# Altium PCB SIM908.PcbDoc
Units mm, origin at the board's own origin, x right, y up, seen from the top; angles counter-clockwise.
Board outline 152.4 x 101.6 mm, 2 copper layers (Top Layer, Bottom Layer), stack 0.325 mm thick; 92 components, 54 nets, 438 pads, 54 vias.
Unrouted connection lines stored in the file: 56.
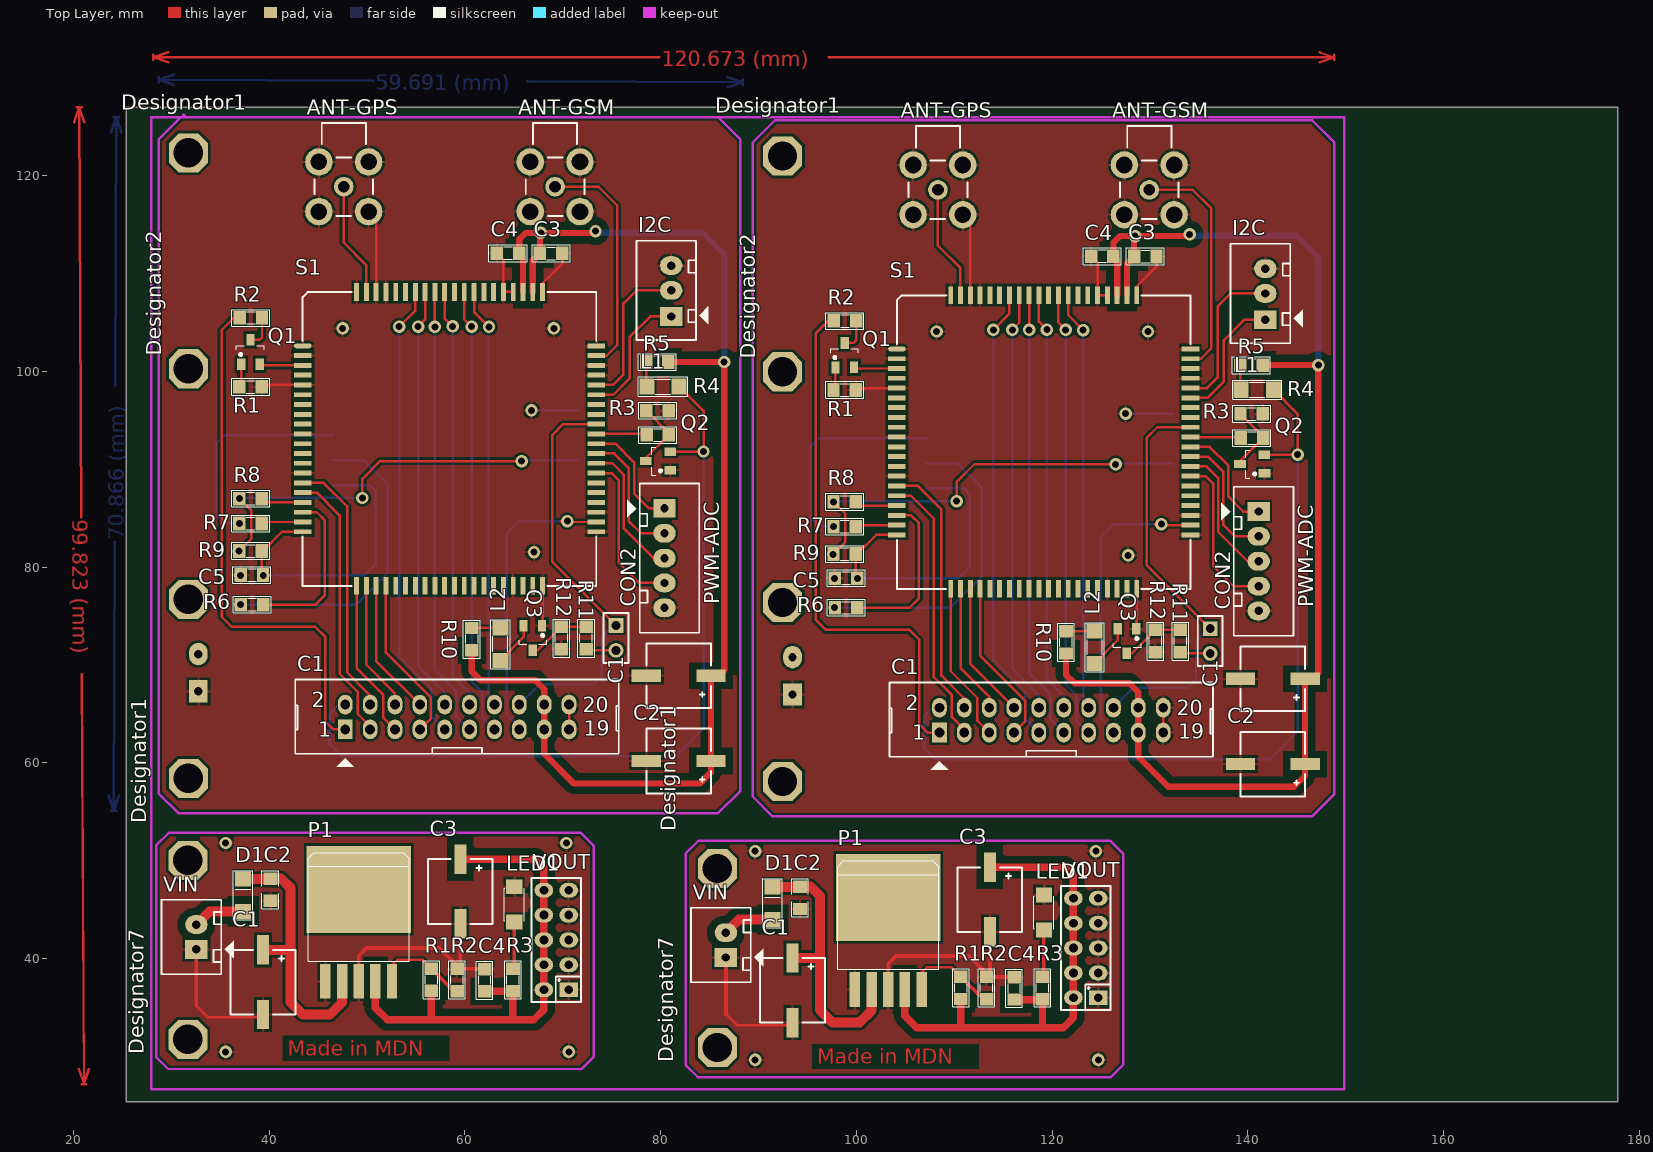
[diagram p0: Top Layer view]
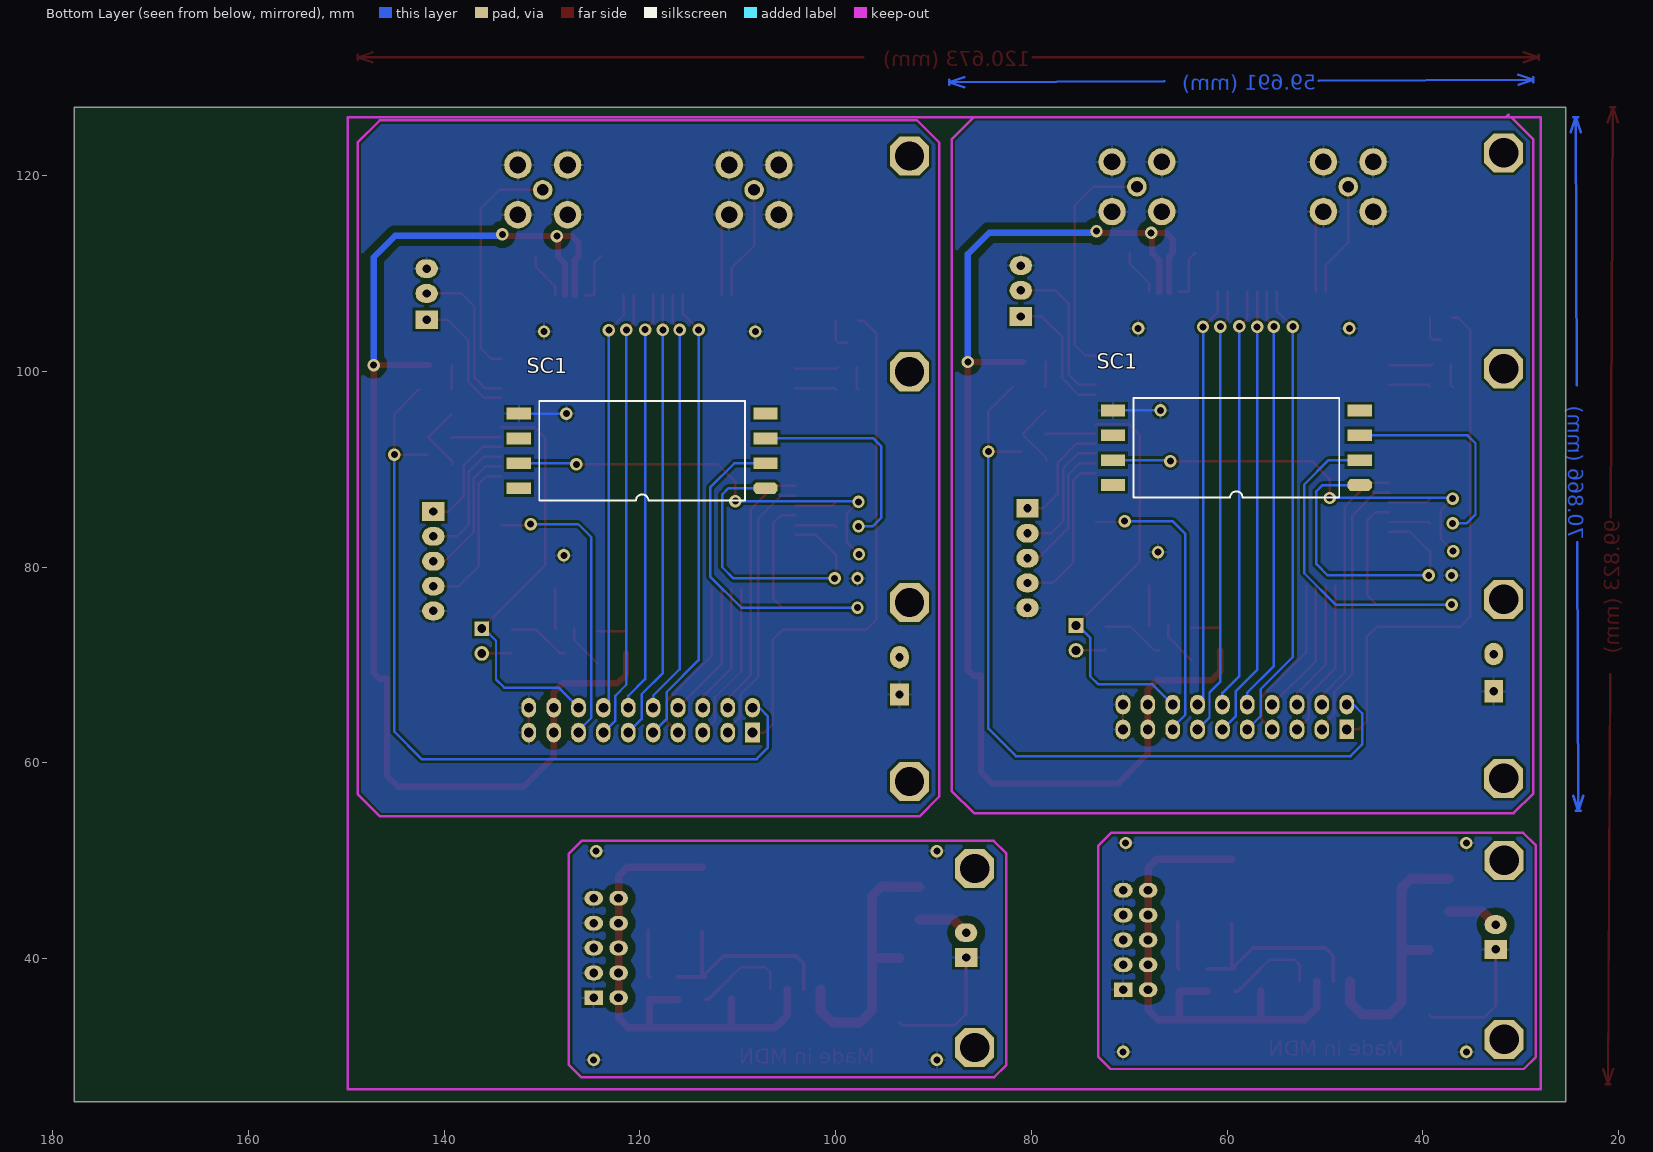
[diagram p1: Bottom Layer view, seen from below]
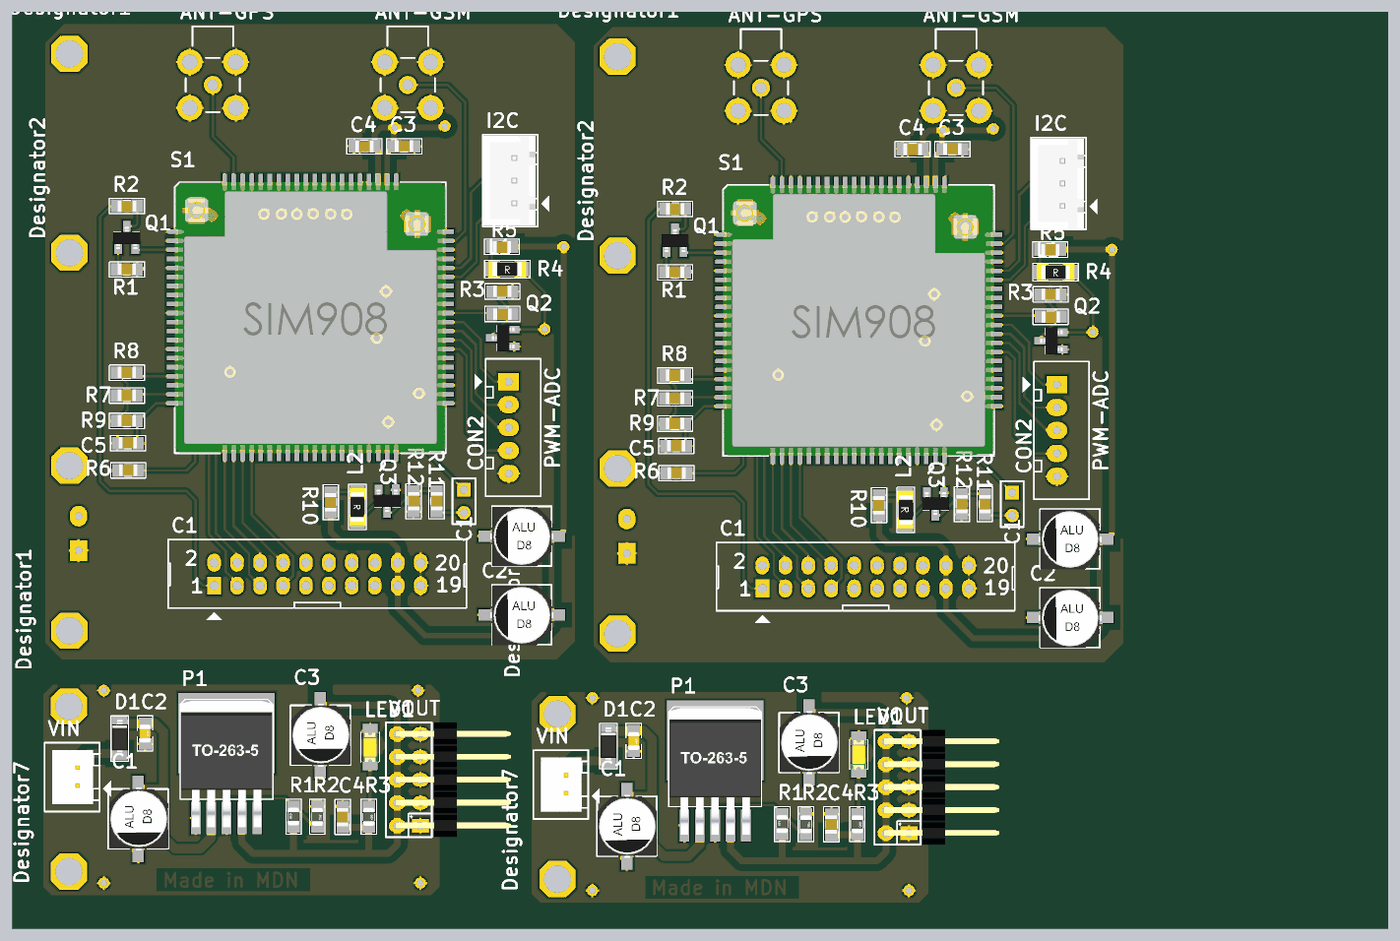
[diagram p2: 3D render of the assembled board from above, using the file's embedded part models]

## Layer stack, top to bottom
Top Layer: signal copper 0.0356
Dielectric 1: core 0.254, FR-4, Dk 4.2
Bottom Layer: signal copper 0.0356

## Board outline
25.4,25.4 177.8,25.4 177.8,127 25.4,127

## Design rules (kind name [scope] priority, off if disabled: settings)
Clearance Clearance_1 [InNet('IN')] p1: gap=0.762
Clearance OUT_1 [InNet('OUT')] p2: gap=0.762
Clearance VCC1 [InNet('VCC')] p3: gap=0.762
Clearance [All] p4: gap=0.254
PolygonConnect [All] p1: connectstyle=Relief reliefconductorwidth=0.254 reliefentries=4 polygonreliefangle="90 Angle" airgapwidth=0.254
RoutingVias [All] p1: holewidth=0.711 width=1.27 viastyle="Through Hole" minholewidth=0.711 minwidth=1.27 maxholewidth=0.711 maxwidth=1.27
SolderMaskExpansion [All] p1: expansion=0.102
UnpouredPolygon [All] p1: allowunpoured=FALSE
Width OUT [InNet('OUT')] p1: maxlimit=1.016 minlimit=0.762 preferedwidth=0.762
Width VCC [InNet('VCC')] p2: maxlimit=0.762 minlimit=0.635 preferedwidth=0.762
Width [All] p3: maxlimit=0.254 minlimit=0.254 preferedwidth=0.254
29 further rules are at their usual default settings.

## Components (designator, comment, footprint, x,y, rotation, side; value= is the part's Value field where it differs from the comment)
ANT-GPS "JP5" MCX5.08-H5 108.331,118.554 r270 top
ANT-GPS "JP5" MCX5.08-H5 47.625,118.872 r270 top
ANT-GSM "JP5" MCX5.08-H5 129.921,118.554 r270 top
ANT-GSM "JP5" MCX5.08-H5 69.215,118.872 r270 top
C1 "100uF/450V" CAP-D8-220uF/16V 93.472,36.767 r270 top
C1 "100uF" CAP-D8-220uF/16V 142.545,68.593 r180 top
C1 "Header 10x2" Hed2X10 108.483,63.106 r0 top (schematic designator Connector1)
C1 "Header 10x2" Hed2X10 47.777,63.424 r0 top (schematic designator Connector1)
C1 "100uF" CAP-D8-220uF/16V 81.839,68.91 r180 top
C1 "100uF/450V" CAP-D8-220uF/16V 39.37,37.592 r270 top
C2 "1uF/450V" CAP0805 94.234,46.215 r270 top
C2 "100uF" CAP-D8-220uF/16V 142.545,59.88 r180 top
C2 "100uF" CAP-D8-220uF/16V 81.839,60.198 r180 top
C2 "1uF/450V" CAP0805 40.132,47.041 r270 top
C3 "220uF/450V" CAP-D8-220uF/16V 113.64,46.038 r270 top
C3 "0.1uF" SM-0805 129.515,111.747 r180 top
C3 "0.1uF" SM-0805 68.809,112.065 r180 top
C3 "220uF/450V" CAP-D8-220uF/16V 59.538,46.863 r270 top
C4 "103" SM-0805 116.129,36.97 r270 top
C4 "o.1uF" SM-0805 125.12,111.773 r0 top
C4 "o.1uF" SM-0805 64.414,112.09 r0 top
C4 "103" SM-0805 62.027,37.795 r270 top
C5 "103" SM-0805 98.933,78.88 r180 top
C5 "103" SM-0805 38.227,79.197 r180 top
CON2 "JP2" HDR1X2 136.144,73.724 r270 top
CON2 "JP2" HDR1X2 75.438,74.041 r270 top
D1 "1N5822" Diode1206 91.44,45.657 r90 top
D1 "1N5822" Diode1206 37.338,46.482 r90 top
Designator1 "Comment" VIT 85.795,49.212 r0 top
Designator1 "Comment" VIT 92.456,122.009 r0 top
Designator1 "Comment" VIT 31.75,122.326 r0 top
Designator1 "Comment" VIT 31.693,50.038 r0 top
Designator2 "Comment" VIT 92.456,99.962 r0 top
Designator2 "Comment" VIT 31.75,100.279 r0 top
Designator7 "Comment" VIT 85.795,30.924 r0 top
Designator7 "Comment" VIT 31.693,31.75 r0 top
I2C "JP3" CON3 141.783,105.423 r90 top
I2C "JP3" CON3 81.077,105.74 r90 top
L1 "LED" SM-1206 140.945,98.133 r0 top
L1 "LED" SM-1206 80.239,98.45 r0 top
L2 "LED" SM-1206 124.333,71.819 r270 top
L2 "LED" SM-1206 63.627,72.136 r270 top
LED1 "LED" LED1206-Yellow 119.151,42.913 r90 top
LED1 "LED" LED1206-Yellow 65.049,43.739 r90 top
P1 "MIC29302" LM2576_TO-263 103.251,44.463 r0 top
P1 "MIC29302" LM2576_TO-263 49.149,45.288 r0 top
PWM-ADC "JP5" CON5 141.097,85.687 r270 top
PWM-ADC "JP5" CON5 80.391,86.004 r270 top
Q1 "C1815" 2N2222 98.806,101.663 r0 top
Q1 "C1815" 2N2222 38.1,101.981 r0 top
Q2 "C1815" 2N2222 140.437,90.538 r90 top
Q2 "C1815" 2N2222 79.731,90.856 r90 top
Q3 "C1815" 2N2222 127.635,72.453 r180 top
Q3 "C1815" 2N2222 66.929,72.771 r180 top
R1 "100k" RES0805 110.668,35.877 r90 top
R1 "10K" SM-0805 98.806,98.108 r180 top
R1 "10K" SM-0805 38.1,98.425 r180 top
R1 "100k" RES0805 56.566,36.703 r90 top
R2 "43k" RES0805 113.309,38.138 r270 top
R2 "4K7" SM-0805 98.831,105.169 r0 top
R2 "4K7" SM-0805 38.125,105.486 r0 top
R2 "43k" RES0805 59.207,38.964 r270 top
R3 "470" RES0805 119.012,38.138 r270 top
R3 "4.7K" SM-0805 140.411,93.205 r0 top
R3 "4.7K" SM-0805 79.705,93.523 r0 top
R3 "470" RES0805 64.91,38.964 r270 top
R4 "10K" SM-0805 140.386,95.669 r180 top
R4 "10K" SM-0805 79.68,95.987 r180 top
R5 "330" SM-0805 140.36,100.647 r0 top
R5 "330" SM-0805 79.654,100.965 r0 top
R6 "1k" SM-0805 98.958,75.857 r180 top
R6 "1k" SM-0805 38.252,76.175 r180 top
R7 "1k" SM-0805 98.806,84.138 r180 top
R7 "1k" SM-0805 38.1,84.455 r180 top
R8 "1k" SM-0805 98.806,86.677 r180 top
R8 "1k" SM-0805 38.1,86.995 r180 top
R9 "1k" SM-0805 98.806,81.343 r180 top
R9 "1k" SM-0805 38.1,81.661 r180 top
R10 "330" SM-0805 121.412,72.326 r270 top
R10 "330" SM-0805 60.706,72.644 r270 top
R11 "4.7K" SM-0805 133.096,72.453 r90 top
R11 "4.7K" SM-0805 72.39,72.771 r90 top
R12 "10K" SM-0805 130.556,72.453 r90 top
R12 "10K" SM-0805 69.85,72.771 r90 top
S1 "SIM908" SIM908 104.14,102.298 r0 top
S1 "SIM908" SIM908 43.434,102.616 r0 top
SC1 "SIM CARD" "SIM CARD" 107.163,88.075 r0 bottom
SC1 "SIM CARD" "SIM CARD" 46.457,88.392 r0 bottom
VIN "JP2" CON2 86.665,40.119 r90 top
VIN "JP2" CON2 32.563,40.945 r90 top
VOUT "Header 5x2" HED2X5_cen 124.714,36.005 r90 top
VOUT "Header 5x2" HED2X5_cen 70.612,36.83 r90 top

## Footprints (in the part's own frame and the unit in brackets; to place one, negate y for a bottom-side part, rotate by r counter-clockwise, add the part's x,y. Pads: shape width x height; smd on the part's side, far side on the other; paste and mask are expansions set on the pad)
2N2222 [mm] "SOT 23B"
  rect 0.85x1.2 smd: 1(-0.95,-1.25) 2(0.94,-1.245) 3(0,1.25)
  silkscreen extent -1.45,-0.38 1.4,0.64, body extent -1.5,-1.3 1.5,1.2, height 1.06
CAP0805 [mil]
  rect 50x55 smd: 1(-45,0) 2(45,0)
  silkscreen extent -77,-34 76,33, body extent -39,-25 39,25, height 31
CAP-D8-220uF/16V [mm] "6.3 x 7.7 mm"
  rect 3x1.25 smd: 1(-3.302,0) 2(3.302,0)
  silkscreen extent -3.3,-3.3 3.3,3.3, body extent -3.5,-3.25 3.5,3.35, height 7.72
CON2 [mil] "CON2"
  rect 75x90 hole 34: 1(0,0)
  oval 75x90 hole 34: 2(100,0)
  silkscreen extent -100,-150 200,140, body extent -68,-70 168,107, height 236
CON3 [mil] "CON 3"
  rect 75x90 hole 34: 1(-5,0)
  oval 75x90 hole 34: 2(100,0) 3(200,0)
  silkscreen extent -100,-150 300,140, body extent -95,-90 295,136, height 276
CON5 [mil] "CON5"
  rect 75x90 hole 34: 1(0,0)
  oval 75x90 hole 34: 2(100,0) 3(200,0) 4(300,0) 5(400,0)
  silkscreen extent -100,-150 500,140
Diode1206 [mil]
  rect 60x65 smd: 1(-65,0) 2(65,0)
  silkscreen extent -99,-38 99,39, body extent -72,-35 82,35, height 46
HDR1X2 [mm] "Connector; Header; 2 Position"
  rect 1.5x1.5 hole 0.9: 1(0,0)
  round 1.5 hole 0.9: 2(2.54,0)
  silkscreen extent -1.27,-1.27 3.81,1.27
HED2X5_cen [mm] "Connector; Header; 5x2 Position"
  rect 1.5x1.9 hole 0.9: 1(0,0)
  oval 1.5x1.9 hole 0.9: 2(2.54,0) 3(5.08,0) 4(7.62,0) 5(10.16,0) 6(0,2.54) 7(2.54,2.54) 8(5.08,2.54) 9(7.62,2.54) 10(10.16,2.54)
  silkscreen extent -1.27,-1.27 11.43,3.81, body extent -1.24,-10.02 11.46,2.86, height 5.02
Hed2X10 [mm] "Header 10x2,20 pin, connecter"
  rect 1.5x2 hole 1: 1(0,0)
  oval 1.5x2 hole 1: 2(0,2.54) 3(2.54,0) 4(2.54,2.54) 5(5.08,0) 6(5.08,2.54) 7(7.62,0) 8(7.62,2.54) 9(10.16,0) 10(10.16,2.54) 11(12.7,0) 12(12.7,2.54) 13(15.24,0) 14(15.24,2.54) 15(17.78,0) 16(17.78,2.54) 17(20.32,0) 18(20.32,2.54) 19(22.86,0) 20(22.86,2.54)
  silkscreen extent -5.1,-3.81 27.94,5.1
LED1206-Yellow [mil]
  rect 60x65 smd: 1(0,0) 2(142,0)
  silkscreen extent 6,-40 136,40, body extent 7,-31 133,32, height 43
LM2576_TO-263 [mil]
  rect 420x350 smd: 0(0,70.87)
  rect 42x140 smd: 1(-134,-299.13) 2(-67,-299.21) 3(0,-299.13) 4(67,-299.13) 5(134,-299.13)
  silkscreen extent -203,-218 203,218, body extent -200,-339 200,213, height 180
MCX5.08-H5 [mm] "Connector; RF Coaxial, MCX, Thru-Hole; 5 Position; Right-Angle"
  round 2 hole 1.2: 1(0,0)
  round 2.8 hole 1.7: 2(-2.54,-2.54) 3(2.54,-2.54) 4(2.54,2.54) 5(-2.54,2.54)
  silkscreen extent -6.5,-3 3,3
RES0805 [mil]
  rect 50x55 smd: 1(0,0) 2(90,0)
  silkscreen extent -32,-34 121,33, body extent 6,-25 84,25, height 31
SIM908 [mm]
  oval 1.8x0.5 smd: 1(0,0)
  rect 1.8x0.5 smd: 2(0,-1) 3(0,-2) 4(0,-3) 5(0,-4) 6(0,-5) 7(0,-6) 8(0,-7) 9(0,-8) 10(0,-9) 11(0,-10) 12(0,-11) 13(0,-12) 14(0,-13) 15(0,-14) 16(0,-15) 17(0,-16) 18(0,-17) 19(0,-18) 20(0,-19) 41(30,-19) 42(30,-18) 43(30,-17) 44(30,-16) 45(30,-15) 46(30,-14) 47(30,-13) 48(30,-12) 49(30,-11) 50(30,-10) 51(30,-9) 52(30,-8) 53(30,-7) 54(30,-6) 55(30,-5) 56(30,-4) 57(30,-3) 58(30,-2) 59(30,-1) 60(30,0)
  rect 0.5x1.8 smd: 21(5.5,-24.5) 22(6.5,-24.5) 23(7.5,-24.5) 24(8.5,-24.5) 25(9.5,-24.5) 26(10.5,-24.5) 27(11.5,-24.5) 28(12.5,-24.5) 29(13.5,-24.5) 30(14.5,-24.5) 31(15.5,-24.5) 32(16.5,-24.5) 33(17.5,-24.5) 34(18.5,-24.5) 35(19.5,-24.5) 36(20.5,-24.5) 37(21.5,-24.5) 38(22.5,-24.5) 39(23.5,-24.5) 40(24.5,-24.5) 61(24.5,5.5) 62(23.5,5.5) 63(22.5,5.5) 64(21.5,5.5) 65(20.5,5.5) 66(19.5,5.5) 67(18.5,5.5) 68(17.5,5.5) 69(16.5,5.5) 70(15.5,5.5) 71(14.5,5.5) 72(13.5,5.5) 73(12.5,5.5) 74(11.5,5.5) 75(10.5,5.5) 76(9.5,5.5) 77(8.5,5.5) 78(7.5,5.5) 79(6.5,5.5) 80(5.5,5.5)
  silkscreen extent -0.01,-24.52 29.99,5.48, body extent 0,-24.51 30,5.49, height 3.22
"SIM CARD" [mm]
  oct 2.5x1.2 smd: 1(0,0)
  rect 2.5x1.2 smd: 2(0,-2.54) 3(0,-5.08) 4(0,-7.62) 5(25.2,-7.62) 6(25.2,-5.08) 7(25.2,-2.54) 8(25.2,0)
  silkscreen extent 2.08,-8.89 23.12,1.27
SM-0805 [mil] "Compoment SMD 80x50mil"
  rect 50x55 smd: 1(-45,0) 2(45,0)
  silkscreen extent -77,-34 76,33, body extent -40,-27 40,23, height 24
SM-1206 [mil] "Compoment SMD 120x60mil"
  rect 60x65 smd: 1(-65,0) 2(65,0)
  silkscreen extent -99,-38 99,39, body extent -83,-35 83,36, height 25
VIT [mm] "VIT"
  oct 4x4 hole 3: VIT1(0,0)

## Part data
ANT-GPS ANT-GPS ANT-GSM ANT-GSM PWM-ADC PWM-ADC: library part Con5, "Connector 5"
C1 C1 C1 C1 C2 C2 C2 C2 C3 C3: library part CP9, "Cap 10000uF/63V"
C1 C1: library part HED10X2
C3 C3 C4 C4 C4 C4 C5 C5: library part CM, "Cap SMD"
CON2 CON2 VIN VIN: library part Con2, "Connector 2"
D1 D1: library part D5A, "Diode 5A"
I2C I2C: library part Con3, "Connector 3"
L1 L1 L2 L2 LED1 LED1: "LED Single colour Green and Red"
P1 P1: library part LM2576
Q1 Q1 Q2 Q2 Q3 Q3: "NPN 600mW, ECB"
R1 R1 R1 R1 R2 R2 R2 R2 R3 R3 R3 R3 R4 R4 R5 R5 R6 R6 R7 R7 R8 R8 R9 R9 R10 R10 R11 R11 R12 R12: library part R, "Resistor 1/4W"
VOUT VOUT: library part HED5x2

## Free pads (board coordinates)
  oct 4x4 hole 3: 0(31.75,58.42) 0(92.456,58.102) 1(31.75,76.708) 1(92.456,76.391)
  oval 1.905x2.286 hole 0.864: 2(32.766,71.12) 2(93.472,70.802)
  rect 1.905x2.286 hole 0.864: 3(32.766,67.31) 3(93.472,66.992)

## Via types
v1: diameter 1.27, hole 0.711, Top Layer to Bottom Layer, 54 vias

## Nets (pads, with @x,y where several pads share a name; then routed paths per layer and width w, separated by ;. In a path a pad name is that pad's centre, name@x,y a point inside that pad or via, vN(x,y) a via of type N, cw(c..) or ccw(c..) an arc to the next point about the centre after c; other vN are vias at no path point)
ADC: PWM-ADC.4 S1.47 | length 33.1
  Top Layer w0.254: S1.47@73.434,89.616 74.976,89.616 75.743,88.849 75.743,80.442 77.8,78.384 PWM-ADC.4@80.391,78.384 ; S1.47@134.14,89.298 135.682,89.298 136.449,88.532 136.449,80.124 138.506,78.067 PWM-ADC.4@141.097,78.067
ANT-GPS: ANT-GPS.1 S1.79 | length 23.4
  Top Layer w0.254: ANT-GPS.1@47.625,118.872 47.625,113.157 49.911,110.871 49.911,108.139 S1.79@49.934,108.116 ; ANT-GPS.1@108.331,118.554 108.331,112.84 110.617,110.553 110.617,107.822 S1.79@110.64,107.799
ANT-GSM: ANT-GSM.1 S1.59 | length 48
  Top Layer w0.254: ANT-GSM.1@69.215,118.872 73.66,118.872 75.565,116.967 75.565,102.692 74.489,101.616 S1.59@73.434,101.616 ; ANT-GSM.1@129.921,118.554 134.366,118.554 136.271,116.649 136.271,102.375 135.195,101.299 S1.59@134.14,101.299
DTR: C1.11 S1.72 | length 92.3
  Top Layer w0.254: v1(56.934,104.559) S1.72@56.934,108.116 ; v1(117.64,104.241) S1.72@117.64,107.799
  Bottom Layer w0.254: v1(56.934,104.559) 56.934,69.507 59.106,67.335 59.106,64.795 C1.11@60.477,63.424 ; v1(117.64,104.241) 117.64,69.19 119.812,67.018 119.812,64.478 C1.11@121.183,63.106
GND: ANT-GPS.2 ANT-GPS.3 ANT-GPS.4 ANT-GPS.5 ANT-GSM.2 ANT-GSM.3 ANT-GSM.4 ANT-GSM.5 C1.2@39.37,34.29 C1.2@78.537,68.91 C1.2@93.472,33.465 C1.2@139.243,68.593 C1.19 C1.20 C2.2 C3.1@69.952,112.065 C3.1@130.658,111.747 C3.2@59.538,43.561 C3.2@113.64,42.735 C4.1 C5.2 I2C.3 LED1.2 P1.1 P1.3 pad.3 PWM-ADC.5 Q2.1 Q3.1 R1.1@39.243,98.425 R1.1@99.949,98.108 R2.1@59.207,38.964 R2.1@113.309,38.138 R4.1 R12.1 S1.1 S1.2 S1.5 S1.10 S1.14 S1.37 S1.40 S1.41 S1.43 S1.57 S1.58 S1.60 S1.61 S1.64 S1.65 S1.77 S1.78 S1.80 SC1.5 VIN.1 VOUT.1 VOUT.2 VOUT.3 VOUT.4 VOUT.5 | length 138.4
  Top Layer w0.254: 32.563,35.179 33.706,34.036 39.116,34.036 C1.2@39.37,34.29 ; R1.1@39.243,98.425 39.434,98.616 S1.5@43.434,98.616 ; ANT-GPS.4@50.165,116.332 50.934,115.563 S1.78@50.934,108.116 ; C4.1@63.271,112.09 63.934,111.428 63.934,108.116 S1.64@64.934,108.116 ; Q3.1@67.879,74.021 67.934,74.076 S1.40@67.934,78.116 ; S1.61@67.934,108.116 67.934,109.006 69.952,111.023 C3.1@69.952,112.065 ; C1.19@70.637,63.424 C1.20@70.637,65.964 ; 86.665,34.353 87.808,33.21 93.218,33.21 C1.2@93.472,33.465 ; R1.1@99.949,98.108 100.14,98.299 S1.5@104.14,98.299 ; ANT-GPS.4@110.871,116.014 111.64,115.245 S1.78@111.64,107.799 ; C4.1@123.977,111.773 124.64,111.11 124.64,107.799 S1.64@125.64,107.799 ; Q3.1@128.585,73.704 128.64,73.759 S1.40@128.64,77.798 ; S1.61@128.64,107.799 128.64,108.688 130.658,110.706 C3.1@130.658,111.747 ; C1.19@131.343,63.106 C1.20@131.343,65.646
  Top Layer w0.381: 32.563,35.179 32.563,40.945 VIN.1@32.614,40.894 ; P1.3@49.149,37.69 49.149,40.31 49.936,41.097 57.379,41.097 59.207,39.268 R2.1@59.207,38.964 ; C3.2@59.538,43.561 59.538,39.294 R2.1@59.207,38.964 ; C4.1@62.027,38.938 62.001,38.964 R2.1@59.207,38.964 ; 86.665,34.353 86.665,40.119 VIN.1@86.716,40.069 ; P1.3@103.251,36.865 103.251,39.484 104.038,40.272 111.481,40.272 113.309,38.443 R2.1@113.309,38.138 ; C3.2@113.64,42.735 113.64,38.468 R2.1@113.309,38.138 ; C4.1@116.129,38.113 116.103,38.138 R2.1@113.309,38.138
  Bottom Layer w0.254: v1(66.802,96.012) SC1.5@71.657,96.012 ; v1(127.508,95.694) SC1.5@132.363,95.694
  other v1: 89.662,29.654 124.714,29.654 35.56,30.48 70.612,30.48 89.662,50.99 124.46,50.99 35.56,51.816 70.358,51.816 97.765,78.854 37.059,79.172 127.762,81.216 67.056,81.534 108.204,104.076 129.794,104.076 47.498,104.394 69.088,104.394
GPS-RX: C1.3 S1.16 | length 55.8
  Top Layer w0.254: S1.16@43.434,87.616 44.87,87.616 47.193,85.293 47.193,69.113 49.047,67.259 49.047,64.999 50.317,63.729 C1.3@50.317,63.424 ; S1.16@104.14,87.298 105.576,87.298 107.899,84.976 107.899,68.796 109.753,66.942 109.753,64.681 111.023,63.411 C1.3@111.023,63.106
GPS-TX: C1.4 S1.15 | length 53.5
  Top Layer w0.254: S1.15@43.434,88.616 45.572,88.616 47.981,86.208 47.981,69.24 50.317,66.904 C1.4@50.317,65.964 ; S1.15@104.14,88.298 106.278,88.298 108.687,85.89 108.687,68.923 111.023,66.586 C1.4@111.023,65.646
GPS-VATIN: S1.76
GPS-VATOUT: S1.75
IN: D1.1 VIN.2 | length 10.7
  Top Layer w1.016: VIN.2@32.563,43.485 33.909,44.831 D1.1@37.338,44.831 ; VIN.2@86.665,42.659 88.011,44.005 D1.1@91.44,44.005
KEY: Q1.2 S1.3 | length 8.9
  Top Layer w0.254: Q1.2@39.04,100.736 39.16,100.616 S1.3@43.434,100.616 ; Q1.2@99.746,100.419 99.866,100.299 S1.3@104.14,100.299
LED: C1.2@47.777,65.964 C1.2@108.483,65.646 L1.2 Q2.2 | length 168.7
  Top Layer w0.254: Q2.2@80.975,91.796 84.353,91.796 v1(84.379,91.821) 84.379,95.961 L1.2@81.89,98.45 ; Q2.2@141.681,91.478 145.059,91.478 v1(145.085,91.504) 145.085,95.644 L1.2@142.596,98.133
  Bottom Layer w0.254: C1.2@47.777,65.964 47.092,65.964 46.203,65.075 46.203,61.874 47.371,60.706 81.585,60.706 84.379,63.5 v1(84.379,91.821) ; C1.2@108.483,65.646 107.798,65.646 106.909,64.757 106.909,61.557 108.077,60.389 142.291,60.389 145.085,63.182 v1(145.085,91.504)
MIC1N: C1.7 S1.24 | length 34.1
  Top Layer w0.254: S1.24@51.934,78.116 51.934,71.277 56.528,66.682 56.528,64.555 C1.7@55.397,63.424 ; S1.24@112.64,77.798 112.64,70.959 117.234,66.365 117.234,64.237 C1.7@116.103,63.106
MIC1P: C1.8 S1.23 | length 28
  Top Layer w0.254: S1.23@50.934,78.116 50.934,70.427 C1.8@55.397,65.964 ; S1.23@111.64,77.798 111.64,70.11 C1.8@116.103,65.646
MIC2N: S1.28
MIC2P: S1.27
NetC1_1: C1.1@39.37,40.894 C1.1@93.472,40.069 C2.1@40.132,48.184 C2.1@94.234,47.358 D1.2 P1.2 | length 56.6
  Top Layer w0.254: C2.1@40.081,48.133 C2.1@40.132,48.184 ; 41.91,40.894 42.164,40.894 ; C2.1@94.183,47.307 C2.1@94.234,47.358 ; 96.012,40.069 96.266,40.069
  Top Layer w1.016: D1.2@37.338,48.133 C2.1@40.081,48.133 ; C1.1@39.37,40.894 41.91,40.894 42.164,41.148 42.164,47.244 41.224,48.184 C2.1@40.132,48.184 ; 42.164,40.894 42.164,35.56 43.434,34.29 46.228,34.29 47.447,35.509 P1.2@47.447,37.688 ; D1.2@91.44,47.307 C2.1@94.183,47.307 ; C1.1@93.472,40.069 96.012,40.069 96.266,40.322 96.266,46.419 95.326,47.358 C2.1@94.234,47.358 ; 96.266,40.069 96.266,34.734 97.536,33.465 100.33,33.465 101.549,34.684 P1.2@101.549,36.863
NetCON2_2: CON2.2 R11.1 | length 6.2
  Top Layer w0.254: R11.1@72.39,71.628 72.517,71.501 CON2.2@75.438,71.501 ; R11.1@133.096,71.31 133.223,71.183 CON2.2@136.144,71.183
NetL1_1: L1.1 R5.1 | length 5.1
  Top Layer w0.254: R5.1@78.511,100.965 78.511,98.527 L1.1@78.588,98.45 ; R5.1@139.217,100.647 139.217,98.209 L1.1@139.294,98.133
NetL2_1: L2.1 R10.1 | length 5.8
  Top Layer w0.254: R10.1@60.706,73.787 L2.1@63.627,73.787 ; R10.1@121.412,73.469 L2.1@124.333,73.469
NetL2_2: L2.2 Q3.2 | length 9
  Top Layer w0.254: L2.2@63.627,70.485 65.989,72.847 Q3.2@65.989,74.016 ; L2.2@124.333,70.168 126.695,72.53 Q3.2@126.695,73.698
NetLED1_1: LED1.1 R3.1@64.91,38.964 R3.1@119.012,38.138 | length 9.7
  Top Layer w0.381: R3.1@64.91,38.964 65.049,39.103 LED1.1@65.049,43.739 ; R3.1@119.012,38.138 119.151,38.278 LED1.1@119.151,42.913
NETLIGHT: R3.1@78.562,93.523 R3.1@139.268,93.205 S1.51 | length 10.3
  Top Layer w0.254: S1.51@73.434,93.616 78.469,93.616 R3.1@78.562,93.523 ; S1.51@134.14,93.299 139.175,93.299 R3.1@139.268,93.205
NetP1_5: P1.5 R1.2@56.566,38.989 R1.2@110.668,38.163 R2.2@59.207,36.678 R2.2@113.309,35.852 | length 19.8
  Top Layer w0.254: P1.5@52.553,37.69 52.553,39.345 53.086,39.878 55.677,39.878 R1.2@56.566,38.989 ; P1.5@106.655,36.865 106.655,38.583 107.188,39.116 109.715,39.116 R1.2@110.668,38.163
  Top Layer w0.381: R1.2@56.566,38.989 58.877,36.678 R2.2@59.207,36.678 ; R1.2@110.668,38.163 112.979,35.852 R2.2@113.309,35.852
NetQ1_1: Q1.1 R1.2@36.957,98.425 R1.2@97.663,98.108 | length 4.8
  Top Layer w0.254: R1.2@36.957,98.425 37.15,98.618 Q1.1@37.15,100.731 ; R1.2@97.663,98.108 97.856,98.3 Q1.1@97.856,100.413
NetQ1_3: Q1.3 R2.2@39.268,105.486 R2.2@99.974,105.169 | length 6.6
  Top Layer w0.254: Q1.3@38.1,103.231 39.02,103.231 39.268,103.48 R2.2@39.268,105.486 ; Q1.3@98.806,102.914 99.726,102.914 99.974,103.162 R2.2@99.974,105.169
NetQ2_3: Q2.3 R3.2@80.848,93.523 R3.2@141.554,93.205 R4.2 | length 14.1
  Top Layer w0.254: Q2.3@78.481,90.856 78.481,91.155 80.848,93.523 80.848,93.675 R4.2@78.537,95.987 ; Q2.3@139.187,90.538 139.187,90.838 141.554,93.205 141.554,93.358 R4.2@139.243,95.669
NetQ3_3: Q3.3 R11.2 R12.2 | length 12.9
  Top Layer w0.254: Q3.3@66.929,71.521 67.457,71.521 69.85,73.914 R11.2@72.39,73.914 ; Q3.3@127.635,71.203 128.163,71.203 130.556,73.596 R11.2@133.096,73.596
NetR6_2: R6.2 SC1.2 | length 64.3
  Bottom Layer w0.254: v1(37.059,76.175) 48.92,76.175 52.121,79.375 52.121,88.443 49.632,90.932 SC1.2@46.457,90.932 ; v1(97.765,75.857) 109.626,75.857 112.827,79.057 112.827,88.125 110.338,90.614 SC1.2@107.163,90.614
NetR7_2: R7.2 SC1.3 | length 44.3
  Bottom Layer w0.254: v1(36.957,84.48) 35.535,84.48 34.62,85.395 34.62,92.659 35.433,93.472 SC1.3@46.457,93.472 ; v1(97.663,84.163) 96.241,84.163 95.326,85.077 95.326,92.342 96.139,93.154 SC1.3@107.163,93.154
NetR8_2: R8.2 R9.2 SC1.7 | length 87.9
  Top Layer w0.254: v1(36.906,81.636) 38.176,82.906 38.176,85.776 v1(36.957,86.995) ; v1(49.53,87.071) 49.53,89.027 51.333,90.83 v1(65.786,90.83) ; v1(97.612,81.318) 98.882,82.588 98.882,85.458 v1(97.663,86.677) ; v1(110.236,86.754) 110.236,88.709 112.039,90.513 v1(126.492,90.513)
  Bottom Layer w0.254: v1(36.957,86.995) 37.033,87.071 v1(49.53,87.071) ; v1@65.786,90.932 v1(65.786,90.83) 65.888,90.932 SC1.7@71.657,90.932 ; v1(97.663,86.677) 97.739,86.754 v1(110.236,86.754) ; v1@126.492,90.614 v1(126.492,90.513) 126.594,90.614 SC1.7@132.363,90.614
ON/OFF: C1.1@47.777,63.424 C1.1@108.483,63.106 R2.1@36.982,105.486 R2.1@97.688,105.169 | length 108.2
  Top Layer w0.254: R2.1@36.982,105.486 36.398,105.486 35.154,104.242 35.154,74.93 36.17,73.914 44.704,73.914 45.72,72.898 45.72,64.262 46.558,63.424 C1.1@47.777,63.424 ; R2.1@97.688,105.169 97.104,105.169 95.86,103.924 95.86,74.612 96.876,73.596 105.41,73.596 106.426,72.581 106.426,63.944 107.264,63.106 C1.1@108.483,63.106
OUT: C3.1@59.538,50.165 C3.1@113.64,49.34 C4.2@62.027,36.652 C4.2@116.129,35.827 P1.4 R1.1@56.566,36.703 R1.1@110.668,35.877 R3.2@64.91,36.678 R3.2@119.012,35.852 VOUT.6 VOUT.7 VOUT.8 VOUT.9 VOUT.10 | length 105
  Top Layer w0.762: P1.4@50.851,37.69 50.851,35.001 52.07,33.782 56.566,33.782 R1.1@56.566,36.703 ; 56.591,33.782 67.056,33.782 68.072,34.798 68.072,36.83 68.072,39.37 68.072,41.91 68.072,44.45 68.072,46.99 68.072,49.276 67.183,50.165 C3.1@59.538,50.165 ; C4.2@62.027,36.652 64.884,36.652 64.91,36.678 64.91,34.176 ; P1.4@104.953,36.865 104.953,34.176 106.172,32.956 110.668,32.956 R1.1@110.668,35.877 ; 110.693,32.956 121.158,32.956 122.174,33.972 122.174,36.005 122.174,38.544 122.174,41.084 122.174,43.624 122.174,46.164 122.174,48.45 121.285,49.34 C3.1@113.64,49.34 ; C4.2@116.129,35.827 118.986,35.827 119.012,35.852 119.012,33.35
PWM1: PWM-ADC.3 S1.48 | length 28.4
  Top Layer w0.254: S1.48@73.434,90.616 75.068,90.616 76.251,89.433 76.251,83.94 79.266,80.924 PWM-ADC.3@80.391,80.924 ; S1.48@134.14,90.298 135.774,90.298 136.957,89.116 136.957,83.622 139.972,80.607 PWM-ADC.3@141.097,80.607
PWM2: PWM-ADC.2 S1.49 | length 27
  Top Layer w0.254: S1.49@73.434,91.616 75.237,91.616 76.759,90.094 76.759,84.684 77.978,83.464 PWM-ADC.2@80.391,83.464 ; S1.49@134.14,91.298 135.943,91.298 137.465,89.776 137.465,84.366 138.684,83.147 PWM-ADC.2@141.097,83.147
PWM3: PWM-ADC.1 S1.50 | length 23.1
  Top Layer w0.254: S1.50@73.434,92.616 75.38,92.616 77.292,90.703 77.292,87.528 78.816,86.004 PWM-ADC.1@80.391,86.004 ; S1.50@134.14,92.299 136.086,92.299 137.998,90.386 137.998,87.211 139.522,85.687 PWM-ADC.1@141.097,85.687
RI: C1.13 S1.69 | length 92.7
  Top Layer w0.254: S1.69@59.934,108.116 59.934,105.318 v1(60.681,104.572) v1@60.681,104.216 ; S1.69@120.64,107.799 120.64,105.001 v1(121.387,104.254) v1@121.387,103.899
  Bottom Layer w0.254: v1(60.681,104.572) 60.681,68.301 61.798,67.183 61.798,64.643 C1.13@63.017,63.424 ; v1(121.387,104.254) 121.387,67.983 122.504,66.865 122.504,64.325 C1.13@123.723,63.106
RXD: C1.14 S1.68 | length 86.5
  Top Layer w0.254: S1.68@60.934,108.116 60.934,106.071 v1(62.459,104.546) v1@62.687,104.546 ; S1.68@121.64,107.799 121.64,105.754 v1(123.165,104.229) v1@123.393,104.229
  Bottom Layer w0.254: v1(62.459,104.546) 62.459,66.523 C1.14@63.017,65.964 ; v1(123.165,104.229) 123.165,66.205 C1.14@123.723,65.646
SCL: I2C.1 S1.55 | length 26.9
  Top Layer w0.254: S1.55@73.434,97.616 75.162,97.616 76.835,99.289 76.835,103.505 78.943,105.613 I2C.1@81.077,105.613 ; S1.55@134.14,97.299 135.868,97.299 137.541,98.971 137.541,103.188 139.649,105.296 I2C.1@141.783,105.296
SDA: I2C.2 S1.56 | length 31.8
  Top Layer w0.254: S1.56@73.434,98.616 75.121,98.616 76.2,99.695 76.2,106.959 77.521,108.28 I2C.2@81.077,108.28 ; S1.56@134.14,98.299 135.827,98.299 136.906,99.377 136.906,106.642 138.227,107.963 I2C.2@141.783,107.963
SIM-CLK: R7.1 S1.19 | length 8.5
  Top Layer w0.254: R7.1@39.243,84.455 39.404,84.616 S1.19@43.434,84.616 ; R7.1@99.949,84.138 100.11,84.298 S1.19@104.14,84.298
SIM-DATA: R8.1 S1.17 | length 8.7
  Top Layer w0.254: R8.1@39.243,86.995 39.622,86.616 S1.17@43.434,86.616 ; R8.1@99.949,86.677 100.328,86.298 S1.17@104.14,86.298
SIM-RST: R6.1 S1.18 | length 33.9
  Top Layer w0.254: R6.1@39.395,76.175 44.729,76.175 45.669,77.114 45.669,84.811 44.864,85.616 S1.18@43.434,85.616 ; R6.1@100.101,75.857 105.435,75.857 106.375,76.797 106.375,84.493 105.57,85.298 S1.18@104.14,85.298
SIM-VDD: C5.1 R9.1 S1.20 SC1.1 | length 63.3
  Top Layer w0.254: v1(39.395,79.172) 39.37,79.197 39.243,79.324 39.243,81.661 39.37,81.661 41.325,83.616 S1.20@43.434,83.616 ; v1(100.101,78.854) 100.076,78.88 99.949,79.007 99.949,81.343 100.076,81.343 102.031,83.298 S1.20@104.14,83.298
  Bottom Layer w0.254: v1(39.395,79.172) 49.733,79.172 50.876,80.315 50.876,87.757 50.241,88.392 SC1.1@46.457,88.392 ; v1(100.101,78.854) 110.439,78.854 111.582,79.997 111.582,87.439 110.947,88.075 SC1.1@107.163,88.075
SPK1N: C1.5 S1.21 | length 32.6
  Top Layer w0.254: S1.21@48.934,78.116 48.934,69.684 51.638,66.98 51.638,64.643 C1.5@52.857,63.424 ; S1.21@109.64,77.798 109.64,69.366 112.344,66.662 112.344,64.325 C1.5@113.563,63.106
SPK1P: C1.6 S1.22 | length 26.7
  Top Layer w0.254: S1.22@49.934,78.116 49.934,70.03 52.857,67.107 C1.6@52.857,65.964 ; S1.22@110.64,77.798 110.64,69.713 113.563,66.789 C1.6@113.563,65.646
SPK2N: S1.25
SPK2P: S1.26
STATUS: C1.16 CON2.1 S1.52 | length 85.3
  Top Layer w0.254: S1.52@73.434,94.616 70.029,94.616 68.936,93.523 68.936,80.543 CON2.1@75.438,74.041 ; S1.52@134.14,94.299 130.735,94.299 129.642,93.205 129.642,80.226 CON2.1@136.144,73.724
  Bottom Layer w0.254: C1.16@65.557,65.964 67.615,68.021 73.152,68.021 73.99,68.859 73.99,72.796 75.235,74.041 CON2.1@75.438,74.041 ; C1.16@126.263,65.646 128.321,67.704 133.858,67.704 134.696,68.542 134.696,72.479 135.941,73.724 CON2.1@136.144,73.724
TEMP: C1.10 S1.73 | length 87.1
  Top Layer w0.254: v1(55.22,104.572) 55.934,105.286 S1.73@55.934,108.116 ; v1(115.926,104.254) 116.64,104.969 S1.73@116.64,107.799
  Bottom Layer w0.254: v1(55.22,104.572) 55.22,69.901 57.937,67.183 C1.10@57.937,65.964 ; v1(115.926,104.254) 115.926,69.583 118.643,66.865 C1.10@118.643,65.646
TXD: C1.12 S1.71 | length 86.7
  Top Layer w0.254: S1.71@57.934,108.116 57.934,105.413 v1(58.75,104.597) v1@58.75,104.47 ; S1.71@118.64,107.799 118.64,105.096 v1(119.456,104.28) v1@119.456,104.153
  Bottom Layer w0.254: v1(58.75,104.597) 58.75,68.885 60.477,67.158 C1.12@60.477,65.964 ; v1(119.456,104.28) 119.456,68.567 121.183,66.84 C1.12@121.183,65.646
VCC: C1.1@85.141,68.91 C1.1@145.847,68.593 C1.17 C1.18 C2.1@85.141,60.198 C2.1@145.847,59.88 C3.2@67.666,112.065 C3.2@128.372,111.747 C4.2@65.557,112.09 C4.2@126.263,111.773 R5.2 R10.2 S1.62 S1.63 | length 258.9
  Top Layer w0.635: R10.2@60.706,71.501 60.706,69.342 61.595,68.453 67.183,68.453 68.097,67.539 68.097,65.964 68.097,63.424 68.097,60.935 71.145,57.887 83.998,57.887 85.141,59.03 85.141,60.198 85.141,68.91 85.903,68.91 86.487,69.494 v1(86.487,100.965) R5.2@80.797,100.965 ; S1.63@65.934,108.116 65.934,111.714 65.557,112.09 65.557,113.487 66.218,114.148 v1@67.666,114.148 ; S1.62@66.934,108.116 66.934,111.333 67.666,112.065 v1@67.666,114.148 ; v1(73.343,114.325) 73.165,114.148 v1(67.767,114.148) v1@67.666,114.148 ; R10.2@121.412,71.183 121.412,69.025 122.301,68.135 127.889,68.135 128.803,67.221 128.803,65.646 128.803,63.106 128.803,60.617 131.851,57.569 144.704,57.569 145.847,58.712 145.847,59.88 145.847,68.593 146.609,68.593 147.193,69.177 v1(147.193,100.647) R5.2@141.503,100.647 ; S1.63@126.64,107.799 126.64,111.396 126.263,111.773 126.263,113.17 126.924,113.83 v1@128.372,113.83 ; S1.62@127.64,107.799 127.64,111.016 128.372,111.747 v1@128.372,113.83 ; v1(134.048,114.008) 133.871,113.83 v1(128.473,113.83) v1@128.372,113.83
  Bottom Layer w0.635: v1(73.343,114.325) 73.495,114.173 84.303,114.173 86.487,111.989 v1(86.487,100.965) ; v1(134.048,114.008) 134.201,113.855 145.009,113.855 147.193,111.671 v1(147.193,100.647)
VCHG: C1.9 S1.74 | length 94.6
  Top Layer w0.254: v1(53.289,104.572) 54.934,106.217 S1.74@54.934,108.116 ; v1(113.995,104.254) 115.64,105.899 S1.74@115.64,107.799
  Bottom Layer w0.254: v1(53.289,104.572) 53.289,70.815 56.566,67.539 56.566,64.795 C1.9@57.937,63.424 ; v1(113.995,104.254) 113.995,70.498 117.272,67.221 117.272,64.478 C1.9@118.643,63.106
VRTC: C1.15 S1.42 | length 61.8
  Top Layer w0.254: 69.799,84.709 v1(70.46,84.709) 70.553,84.616 S1.42@73.434,84.616 ; 130.505,84.391 v1(131.166,84.391) 131.259,84.298 S1.42@134.14,84.298
  Bottom Layer w0.254: C1.15@65.557,63.424 65.557,63.627 64.262,64.922 64.262,83.388 65.583,84.709 v1(70.46,84.709) ; C1.15@126.263,63.106 126.263,63.309 124.968,64.605 124.968,83.071 126.289,84.391 v1(131.166,84.391)
pads on no net: Designator1.VIT1 Designator2.VIT1 Designator7.VIT1 P1.0 S1.4 S1.6 S1.7 S1.8 S1.9 S1.11 S1.12 S1.13 S1.29 S1.30 S1.31 S1.32 S1.33 S1.34 S1.35 S1.36 S1.38 S1.39 S1.44 S1.45 S1.46 S1.53 S1.54 S1.66 S1.67 S1.70 SC1.4 SC1.6 SC1.8
copper on no net: | length 315.6
  Top Layer w0.254: 20.074,125.473 20.574,127 ; 20.32,126.999 20.828,127.001 ; 20.566,28.699 21.082,27.178 ; 20.787,85.113 20.574,127 ; 20.828,27.177 21.336,27.179 ; 20.869,69.065 21.082,27.178 ; 21.09,125.479 20.574,127 ; 21.582,28.705 21.082,27.178 ; 28.171,131.862 28.171,132.37 ; 29.695,131.607 28.171,132.116 ; 29.695,132.623 28.171,132.116 ; 79.849,132.1 28.171,132.116 ; 97.166,132.095 148.844,132.08 ; 147.32,131.572 148.844,132.08 ; 147.32,132.588 148.844,132.08 ; 148.844,131.826 148.844,132.334
  Bottom Layer w0.254: 23.627,56.644 24.13,55.118 ; 23.871,124.462 24.384,125.984 ; 23.876,55.119 24.384,55.117 ; 24.13,125.985 24.638,125.983 ; 24.228,82.527 24.13,55.118 ; 24.286,98.575 24.384,125.984 ; 24.643,56.64 24.13,55.118 ; 24.887,124.458 24.384,125.984 ; 28.701,129.54 28.703,130.048 ; 30.224,129.28 28.702,129.794 ; 30.228,130.296 28.702,129.794 ; 50.65,129.701 28.702,129.794 ; 66.444,129.633 88.392,129.54 ; 86.866,129.038 88.392,129.54 ; 86.87,130.054 88.392,129.54 ; 88.391,129.286 88.393,129.794

## Polygon pours and split planes (outlines as drawn)
GND on Top Layer "Top Layer-No Net" (solid, remove dead copper, pour order 22): 83.845,52.032 82.55,50.736 82.55,29.146 82.804,28.892 83.795,27.902 126.009,27.902 127.254,29.146 127.254,50.736 125.959,52.032 83.845,52.032
GND on Top Layer "Top Layer-No Net" (solid, remove dead copper, pour order 20): 71.857,52.857 73.152,51.562 73.152,29.972 71.907,28.727 29.693,28.727 28.448,29.972 28.448,51.562 29.743,52.857
GND on Top Layer "Top Layer-No Net" (solid, remove dead copper, pour order 15): 146.558,125.666 148.844,123.38 148.844,56.832 146.558,54.546 91.44,54.546 91.376,54.61 89.408,56.578 89.408,123.38 91.757,125.73 91.948,125.73 146.494,125.73 146.558,125.666
GND on Top Layer "Top Layer-No Net" (solid, remove dead copper, pour order 25): 91.694,125.666 89.408,123.38 89.408,56.578 91.44,54.546 146.558,54.546 148.844,56.832 148.844,123.38 146.558,125.666 91.694,125.666
GND on Top Layer "Top Layer-No Net" (solid, remove dead copper, pour order 21): 83.845,52.032 82.55,50.736 82.55,29.146 83.795,27.902 126.009,27.902 127.254,29.146 127.254,50.736 125.959,52.032 83.845,52.032
GND on Top Layer "Top Layer-No Net" (solid, remove dead copper, pour order 14): 83.845,52.032 125.959,52.032 127.254,50.736 127.254,29.146 126.009,27.902 83.287,27.902 82.55,28.639 82.55,50.736 83.845,52.032
GND on Top Layer "Top Layer-No Net" (solid, remove dead copper, pour order 26): 30.988,125.984 28.702,123.698 28.702,56.896 30.734,54.864 85.852,54.864 88.138,57.15 88.138,123.698 85.852,125.984 30.988,125.984
GND on Bottom Layer "Top Layer-No Net" (solid, remove dead copper, pour order 19): 83.845,52.032 82.55,50.736 82.55,29.146 83.566,28.13 125.781,28.13 126.009,27.902 127.254,29.146 127.254,50.736 125.959,52.032
GND on Bottom Layer "Top Layer-No Net" (solid, remove dead copper, pour order 16): 146.749,125.476 148.844,123.38 148.844,56.832 146.812,54.8 91.948,54.8 91.694,54.546 89.852,56.388 89.599,56.388 89.599,123.571 89.662,123.634 91.694,125.666 146.558,125.666
GND on Bottom Layer "Top Layer-No Net" (solid, remove dead copper, pour order 23): 91.694,125.666 89.408,123.38 89.408,56.578 91.44,54.546 146.558,54.546 148.844,56.832 148.59,57.087 148.59,123.634 146.558,125.666 91.694,125.666
GND on Bottom Layer "Top Layer-No Net" (solid, remove dead copper, pour order 17): 83.845,52.032 82.55,50.736 82.55,29.146 83.795,27.902 125.73,27.902 126.009,27.902 127.254,29.146 127.254,50.736 125.959,52.032 83.845,52.032
GND on Bottom Layer "Top Layer-No Net" (solid, remove dead copper, pour order 24): 30.988,125.984 28.702,123.698 28.702,56.896 30.734,54.864 85.852,54.864 88.138,57.15 87.884,57.404 87.884,123.952 85.852,125.984 30.988,125.984
GND on Bottom Layer "Top Layer-No Net" (solid, remove dead copper, pour order 18): 29.743,52.857 28.448,51.562 28.448,29.972 29.693,28.727 71.628,28.727 71.907,28.727 73.152,29.972 73.152,51.562 71.857,52.857 29.743,52.857

## Keep-outs
Keep-Out Layer:
  lines w0.254: 30.251,52.857 71.857,52.857 73.152,51.562 73.152,29.972 71.907,28.727 69.596,28.727 29.693,28.727 28.448,29.972 28.448,51.562 29.743,52.857 31.267,52.857 ; 84.353,52.032 125.959,52.032 127.254,50.736 127.254,29.146 126.009,27.902 123.698,27.902 83.795,27.902 82.55,29.146 82.55,50.736 83.845,52.032 85.369,52.032 ; 30.988,125.984 27.94,125.984 27.94,26.67 99.06,26.67 149.86,26.67 149.86,125.476 149.86,125.984 31.496,125.984 ; 30.988,125.984 85.852,125.984 88.138,123.698 88.138,57.15 85.852,54.864 41.91,54.864 37.338,54.864 30.734,54.864 28.702,56.896 28.702,123.698 30.988,125.984 ; 31.496,125.984 31.242,126.238 31.496,125.984 ; 89.408,56.578 89.408,123.38 91.694,125.666 146.558,125.666 148.844,123.38 148.844,56.832 146.558,54.546 102.616,54.546 98.044,54.546 91.44,54.546 89.408,56.578

## Other copper
Top Layer:
  text "120.673 (mm)" at 80.103,131.186 h1.52 r359.98
  text "99.823 (mm)" at 19.874,84.854 h1.52 r270.29
  text "Made in MDN" at 41.91,30.074 h1.52
  text "Made in MDN" at 96.012,29.248 h1.52
Bottom Layer:
  text "59.691 (mm)" at 50.9,128.785 h1.52 r359.76
  text "70.866 (mm)" at 25.143,82.778 h1.52 r89.79

## Text inside footprints (layer, text, board x,y; h text height)
C1: Top Overlay "20" at 132.74,64.884 h1.52; Top Overlay "19" at 132.867,62.471 h1.52; Top Overlay "2" at 105.054,65.392 h1.52; Top Overlay "1" at 105.708,62.356 h1.52
C1: Top Overlay "20" at 72.034,65.202 h1.52; Top Overlay "19" at 72.161,62.789 h1.52; Top Overlay "2" at 44.348,65.71 h1.52; Top Overlay "1" at 45.002,62.674 h1.52